# Altium PCB hexbot_运动传感器.PcbDoc
Units mil, origin at the board's own origin, x right, y up, seen from the top; angles counter-clockwise.
Board outline 3150.15 x 2730 mil, 2 copper layers (Top Layer, Bottom Layer); 25 components, 14 nets, 94 pads, 5 vias.
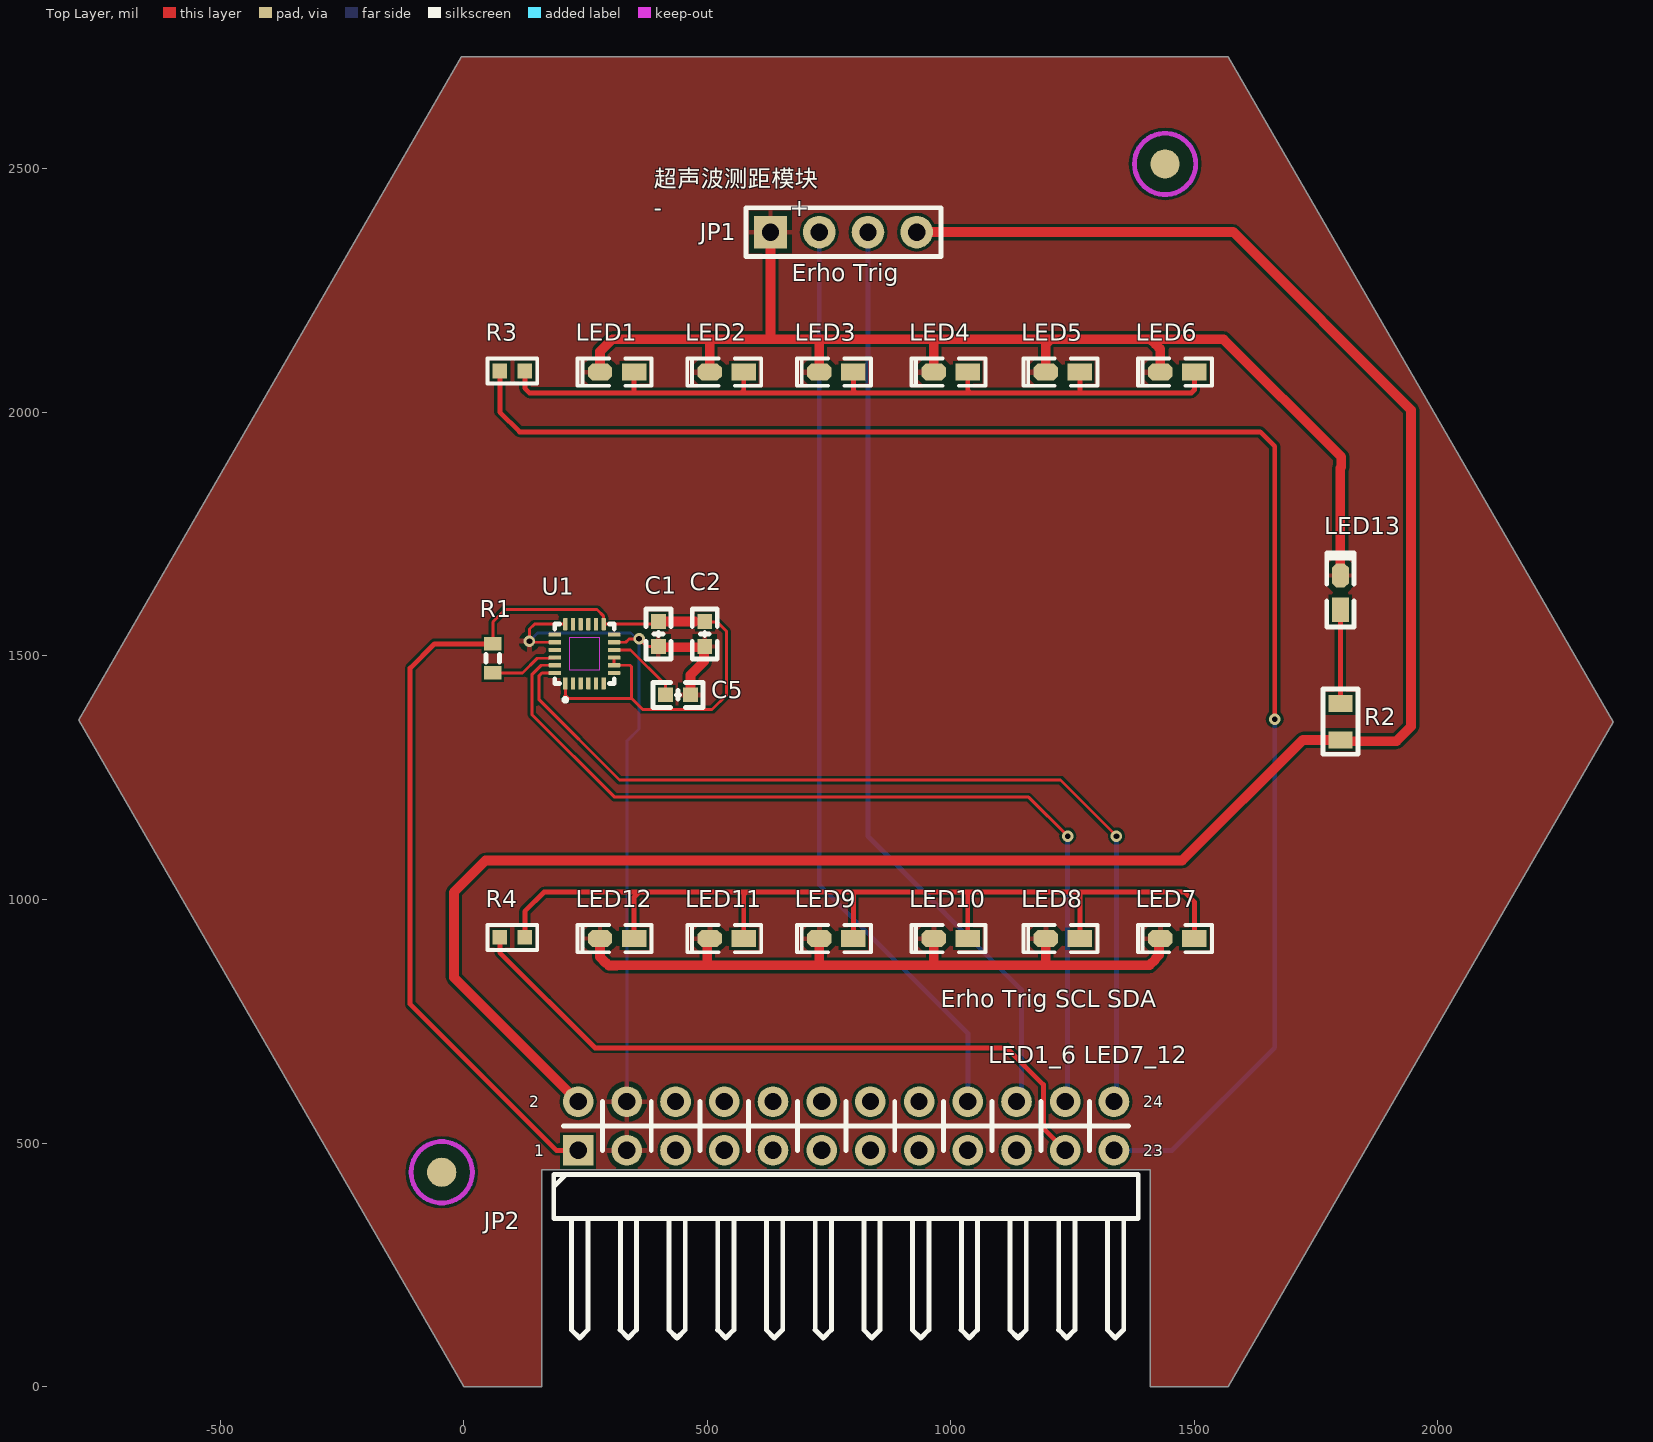
[diagram p0: Top Layer view]
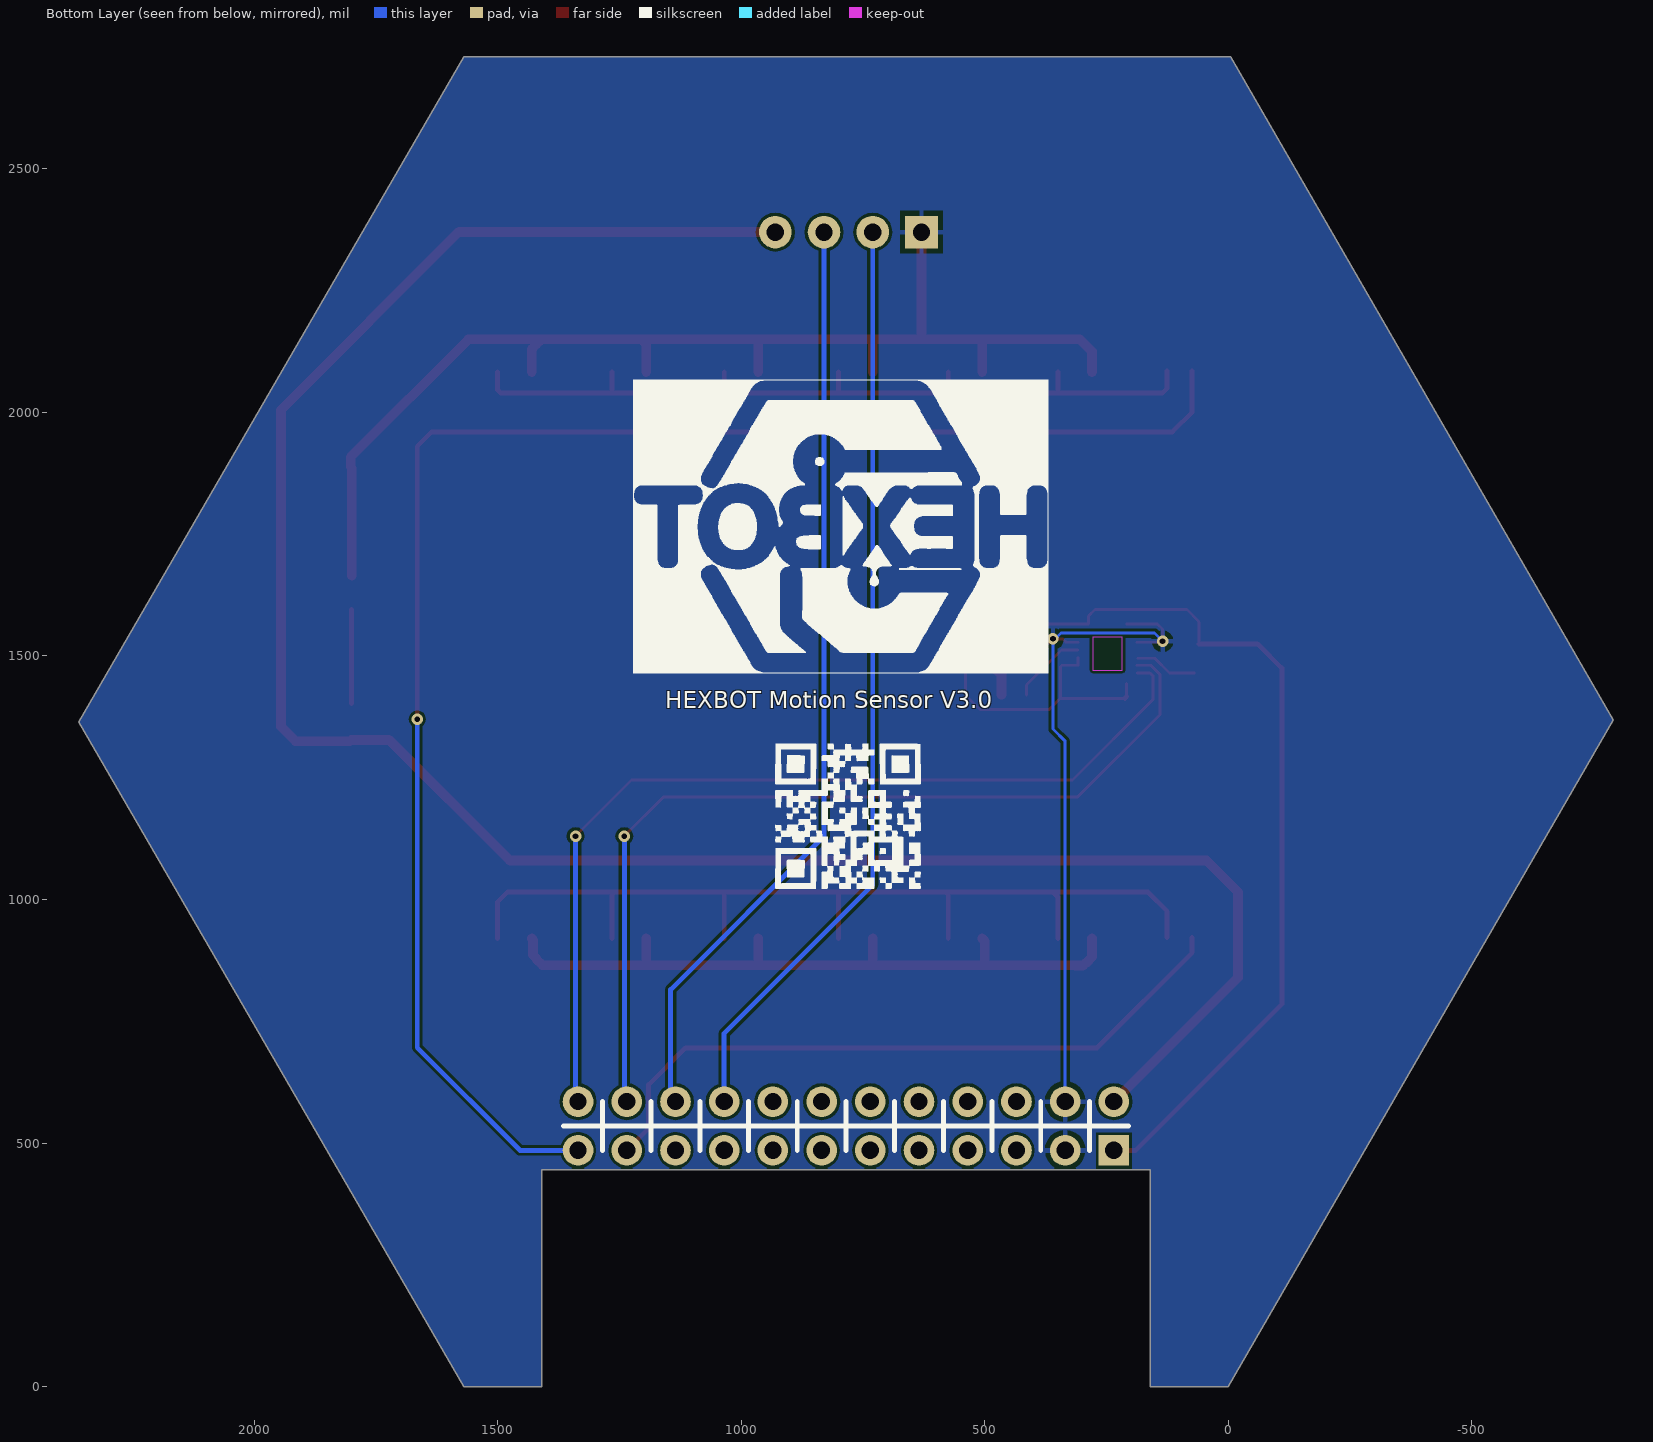
[diagram p1: Bottom Layer view, seen from below]

## Layer stack, top to bottom
Top Solder: solder mask 0.4, Solder Resist, Dk 3.5
Top Layer: signal copper 1.4
Dielectric 1: dielectric 12.6, FR-4, Dk 4.8
Bottom Layer: signal copper 1.4
Bottom Solder: solder mask 0.4, Solder Resist, Dk 3.5

## Board outline
0,0 -790.15,1368.69 -4.71,2730 1570,2730 2360,1364.61 1570,0 1410,0 1410,444.64 160,444.64 160,0

## Design rules (kind name [scope] priority, off if disabled: settings)
Clearance [All] p1: gap=6 ignorepadtopadclearanceinfootprint=FALSE
PolygonConnect [All] p1: connectstyle=Relief reliefconductorwidth=10 reliefentries=4 polygonreliefangle="90 Angle" airgapwidth=10
RoutingVias [All] p1: holewidth=23.62 width=43.31 viastyle="Through Hole" minholewidth=23.62 minwidth=43.31 maxholewidth=28 maxwidth=50
SolderMaskExpansion [All] p1: expansion=4 istentingtop=FALSE
Width [All] p1: maxlimit=20 minlimit=5 preferedwidth=6
30 further rules are at their usual default settings.

## Classes and differential pairs
component class hexbot_运动传感器: C1 C2 C5 JP1 JP2 LED1 LED2 LED3 LED4 LED5 LED6 LED7 LED8 LED9 LED10 LED11 LED12 LED13 R1 R2 R3 R4 U1

## Components (designator, comment, footprint, x,y, rotation, side; value= is the part's Value field where it differs from the comment)
C1 "0.1uF" "C 0603_L" 400,1545 r90 top
C2 "10nF" "C 0603_L" 495,1545 r90 top
C5 "0.1uF" "C 0603_L" 440,1420 r180 top
JP1 "HDR-1X4" HDR2.54-LI-4P 780,2370 r0 top
JP2 "Header 2X11" HDR2.54-WI-2x12P 785,535 r0 top
LED1 "红色" "LED 0603R" 315,2082.85 r180 top
LED2 "红色" "LED 0603R" 540,2082.85 r180 top
LED3 "红色" "LED 0603R" 765,2082.85 r180 top
LED4 "红色" "LED 0603R" 1000,2082.85 r180 top
LED5 "红色" "LED 0603R" 1230,2082.85 r180 top
LED6 "红色" "LED 0603R" 1465,2082.85 r180 top
LED7 "红色" "LED 0603R" 1465,920 r180 top
LED8 "红色" "LED 0603R" 1230,920 r180 top
LED9 "红色" "LED 0603R" 765,920 r180 top
LED10 "红色" "LED 0603R" 1000,920 r180 top
LED11 "红色" "LED 0603R" 540,920 r180 top
LED12 "红色" "LED 0603R" 315,920 r180 top
LED13 "红色" "LED 0603R" 1800,1630 r90 top
mark1 "Mark" Mark 1440,2510 r90 top
mark2 "Mark" Mark -45,440 r90 top
R1 "0R" 0603 60,1495 r270 top
R2 "1K" "R 0805_L" 1800,1365 r270 top
R3 "1K" "R 0603_L" 100,2085 r180 top
R4 "1K" "R 0603_L" 100,922.15 r180 top
U1 "MPU6500" MPU-6050 250,1505 r0 top

## Footprints (in the part's own frame and the unit in brackets; to place one, negate y for a bottom-side part, rotate by r counter-clockwise, add the part's x,y. Pads: shape width x height; smd on the part's side, far side on the other; paste and mask are expansions set on the pad)
0603 [mm]
  rect 0.7x0.9 smd: 1(-0.75,0) 2(0.75,0)
  silkscreen extent -0.2,-0.35 0.2,0.35, body extent -0.83,-0.4 0.77,0.4, height 0.4
"C 0603_L" [mil] "无极性贴片电容                                       淘宝ID:黄晶宝石"
  rect 30x30 smd: 1(-25.59,0) 2(25.59,0)
  silkscreen extent -51,-26 51,26, body extent -31,-16 31,16, height 32
HDR2.54-LI-4P [mm] "排针，4脚"
  rect 1.7x1.7 hole 0.9: 1(-3.81,0)
  round 1.7 hole 0.9: 2(-1.27,0) 3(1.27,0) 4(3.81,0)
  silkscreen extent -5.08,-1.27 5.08,1.27, body extent -5.08,-1.27 5.08,1.27, height 8.5
HDR2.54-WI-2x12P [mm] "双排弯脚排针，12x2脚  淘宝ID:黄晶宝石   店铺网址:https://shop463601444.taobao.com"
  rect 1.6x1.6 hole 0.9: 1(-13.97,-1.27)
  round 1.6 hole 0.9: 2(-13.97,1.27) 3(-11.43,-1.27) 4(-11.43,1.27) 5(-8.89,-1.27) 6(-8.89,1.27) 7(-6.35,-1.27) 8(-6.35,1.27) 9(-3.81,-1.27) 10(-3.81,1.27) 11(-1.27,-1.27) 12(-1.27,1.27) 13(1.27,-1.27) 14(1.27,1.27) 15(3.81,-1.27) 16(3.81,1.27) 17(6.35,-1.27) 18(6.35,1.27) 19(8.89,-1.27) 20(8.89,1.27) 21(11.43,-1.27) 22(11.43,1.27) 23(13.97,-1.27) 24(13.97,1.27)
  silkscreen extent -15.24,-11.06 15.24,1.27, body extent -15.24,-11.23 15.24,1.62, height 5.1
"LED 0603R" [mil] "红色0603LED                                           淘宝ID:黄晶宝石"
  rect 50x35 smd: 1(-35,0.26)
  oct 50x35 smd: 2(35,0.26)
  silkscreen extent -71,-28 81,28, body extent -31,-16 31,16, height 18
Mark [mil]
  round 60 smd mask+39.37: mark(0,0)
  Top Layer keep-out circle w10: c0,0 r62.99
MPU-6050 [mm]
  rrect25% 0.22x0.64 smd: 1(-1.049,-1.561) 2(-0.649,-1.561) 3(-0.249,-1.561) 4(0.151,-1.561) 5(0.551,-1.561) 6(0.951,-1.561) 13(0.951,1.529) 14(0.551,1.529) 15(0.151,1.529) 16(-0.249,1.529) 17(-0.649,1.529) 18(-1.049,1.529)
  rrect25% 0.64x0.22 smd: 7(1.496,-1.016) 8(1.496,-0.616) 9(1.496,-0.216) 10(1.496,0.184) 11(1.496,0.584) 12(1.496,0.984) 19(-1.594,0.984) 20(-1.594,0.584) 21(-1.594,0.184) 22(-1.594,-0.216) 23(-1.594,-0.616) 24(-1.594,-1.016)
  Keep-Out Layer region: 0.721,0.834 0.721,-0.866 -0.819,-0.866 -0.819,0.834
  Keep-Out Layer region: 0.721,0.834 0.721,-0.866 -0.819,-0.866 -0.819,0.834
  silkscreen extent -1.6,-2.52 1.5,1.53
"R 0603_L" [mil] "1/10W贴片电阻                 淘宝ID:黄晶宝石"
  rect 30x30 smd: 1(-25.59,0) 2(25.59,0)
  silkscreen extent -51,-26 51,26, body extent -31,-16 32,16, height 16
"R 0805_L" [mil] "1/8W贴片电阻"
  rect 35x50 smd: 1(-37.4,0) 2(37.4,0)
  silkscreen extent -67,-36 67,36, body extent -39,-25 39,25, height 20

## Part data
C1 C2 C5: library part C, "贴片电容", BOM名称=无极性贴片电容, 唯一出售店铺网址=https://shop463601444.taobao.com, 淘宝ID="封装库来自淘宝 ID：黄晶宝石", 联系售后，技术支持=https://shop463601444.taobao.com
JP1: library part "Header 4", "4P接插件", BOM名称=4P接插件, 学习资源=https://shop463601444.taobao.com, 版权归属="封装库来自淘宝 ID：黄晶宝石"
JP2: library part "Header 12X2", "12*2P接插件", BOM名称=12*2P接插件, 学习资源=https://shop463601444.taobao.com, 版权归属="封装库来自淘宝卖家 ID：黄晶宝石"
LED1 LED2 LED3 LED4 LED5 LED6 LED7 LED8 LED9 LED10 LED11 LED12 LED13: library part LED-SMD, "贴片LED", BOM名称=贴片LED, 学习资源=https://shop463601444.taobao.com, 版权归属="封装库来自淘宝 ID：黄晶宝石"
R1: library part RES2
R2 R3 R4: library part R, "贴片电阻", BOM名称=贴片电阻, 封装库来自淘宝卖家 ID：黄晶宝石=其他店铺购入均为盗版，不享受售后技术支持服务，请立即申请退款, 版权归属="来自淘宝 ID：黄晶宝石", 联系售后=https://shop463601444.taobao.com
U1: library part MPU-9250, "Accelerometer, Gyroscope, Magnetometer, 9 Axis Sensor IÂ²C, SPI Output", Package="TFQFN-24 TDK InvenSense", Availability=Unavailable, MF="TDK InvenSense", MP=MPU-9250, Price=None, SnapEDA_Link=https://www.snapeda.com/parts/MPU-9250/TDK%20InvenSense/view-part/4652549/?ref=snap

## Via types
v1: diameter 23.62, hole 11.81, Top Layer to Bottom Layer, tented both sides, 5 vias

## Nets (pads, with @x,y where several pads share a name; then routed paths per layer and width w, separated by ;. In a path a pad name is that pad's centre, name@x,y a point inside that pad or via, vN(x,y) a via of type N, cw(c..) or ccw(c..) an arc to the next point about the centre after c; other vN are vias at no path point)
3V3: C1.2 C2.2 JP2.1 R1.1 U1.1 U1.8 U1.9 U1.13 | length 2543.8
  Top Layer w6: R1.1 60,1570 85,1595 273.74,1595 287.44,1581.3 U1.13 384.61,1565.2 ; 208.7,1416.3 U1.1 ; 212.5,1412.5 342.5,1412.5 ; U1.9 U1.8 341.49,1480.75 345,1477.23 345,1415 342.5,1412.5 ; 470,1570 520,1570 540,1550 540,1420 510,1390 367.5,1390 345,1412.5 342.5,1412.5
  Top Layer w10: R1.1 -60.47,1524.53 -110,1475 -110,785 190,485 JP2.1 ; 208.7,1416.3 212.5,1412.5 ; C1.2@394.61,1565.2 C1.2
  Top Layer w20: C1.2 475,1570.59
5V: JP1.4 JP2.2 R2.2 | length 4459.8
  Top Layer w20: JP2.2 -20,840 -20,1015 45,1080 1475,1080 1722.6,1327.6 R2.2 1802.6,1325 1915,1325 1945,1355 1945,2005 1580,2370 JP1.4
Erho: JP1.2 JP2.18 | length 1911.3
  Bottom Layer w10: JP1.2 730,1030 1035,725 JP2.18
GND: C1.1 C2.1 C5.1 JP1.1 JP2.3 JP2.4 LED1.2 LED2.2 LED3.2 LED4.2 LED5.2 LED6.2 LED7.2 LED8.2 LED9.2 LED10.2 LED11.2 LED12.2 LED13.2 U1.11 U1.18 U1.20 | length 5615.4
  Top Layer w6: U1.20 135,1527.99 v1(135,1530) 135,1555 145.2,1565.2 U1.18 ; U1.11 332.67,1527.99 339.68,1535 v1(360,1535) 375.59,1519.41 C1.1
  Top Layer w20: LED12.2 280,881.72 291.71,870 292.53,870 297.98,864.55 314.55,864.55 315,865 500,865 ; LED1.2 280,2125 305,2150 510,2150 ; C1.1 401.52,1517.89 493.49,1517.89 493.49,1488.49 465.59,1460.59 C5.1 ; LED11.2 500,914.75 500,865 ; LED2.2 505,2145 510,2150 ; JP1.1 630,2150 ; LED9.2 730,870 725,865 ; LED3.2 730,2150 ; LED10.2 965,870 960,865 ; LED4.2 965,2145 970,2150 ; LED8.2 1195,870 1190,865 ; LED5.2 1195,2140 1205,2150 ; LED7.2 1427.6,917.35 1427.6,885.96 1420,878.36 1420,876.72 1408.28,865 1190,865 ; LED6.2 1430,2130 1419.97,2140.03 1410,2150 ; LED13.2 1799.74,1885.66 1801.72,1887.63 1801.72,1908.28 1560,2150 1410,2150 ; 500,865 725,865 ; 510,2150 630,2150 ; 630,2150 730,2150 ; 725,865 960,865 ; 730,2150 970,2150 ; 960,865 1190,865 ; 970,2150 1205,2150 ; 1205,2150 1410,2150
  Bottom Layer w6: v1(135,1530) 151.83,1546.83 343.4,1546.83 355.23,1535 v1(360,1535) 360,1350 335,1325 JP2.4
LED1_6: JP2.23 R3.2 | length 3369.9
  Top Layer w10: R3.2 74.41,2000.59 115,1960 1635,1960 1665,1930 v1(1665,1370) ; JP2.23 JP2.23@1345,495
  Bottom Layer w10: JP2.23 1454.14,485 1665,695.86 v1(1665,1370)
LED7_12: JP2.21 R4.2 | length 1412.9
  Top Layer w10: R4.2 74.41,890.59 270,695 1115,695 1190,620 1190,530 JP2.21
NetC5_2: C5.2 U1.10 | length 155.8
  Top Layer w6: U1.10 342.76,1512.24 414.41,1440.59 C5.2
NetLED1_1: LED1.1 LED2.1 LED3.1 LED4.1 LED5.1 LED6.1 R3.1 | length 1672.2
  Top Layer w10: R3.1 125.59,2049.41 135,2040 350,2040 ; LED1.1 350,2040 ; LED2.1 575,2045 570,2040 ; LED3.1 800,2045 805,2040 ; LED4.1 1035,2045 1040,2040 ; LED5.1 1265,2040 ; LED6.1 1500,2045.86 1494.14,2040 1265,2040 ; 350,2040 570,2040 ; 570,2040 805,2040 ; 805,2040 1040,2040 ; 1040,2040 1265,2040
NetLED7_1: LED7.1 LED8.1 LED9.1 LED10.1 LED11.1 LED12.1 R4.1 | length 2012.3
  Top Layer w10: R4.1 125.59,975.59 165,1015 360,1015 ; LED12.1 350,1005 360,1015 ; LED11.1 575,1010 580,1015 ; LED9.1 800,1015 ; LED10.1 1035,1015 ; LED8.1 1265,1010 1260,1015 ; LED7.1 1500,995 1480,1015 1265,1015 1260,1015 ; 360,1015 580,1015 ; 580,1015 800,1015 ; 800,1015 1035,1015 ; 1035,1015 1260,1015
NetLED13_1: LED13.1 R2.1 | length 192.7
  Top Layer w10: LED13.1 1800,1594.75 R2.1
NetR1_2: R1.2 U1.22 | length 128.4
  Top Layer w6: R1.2@70,1465 121.06,1465 151.22,1495.17 U1.22@185.92,1495.17
SCL: JP2.22 U1.23 | length 1895.6
  Top Layer w6: U1.23 159.32,1480.75 140,1461.43 140,1380 310,1210 1160,1210 v1(1240,1130)
  Bottom Layer w10: JP2.22 1225,595 1240,610 v1(1240,1130)
SDA: JP2.24 U1.24 | length 1932.1
  Top Layer w6: U1.24 160.54,1465 155,1459.46 155,1410 320,1245 1225,1245 v1(1340,1130)
  Bottom Layer w10: JP2.24 1340,590 v1(1340,1130)
Trig: JP1.3 JP2.20 | length 1919.6
  Bottom Layer w10: JP1.3 830,1130 1145,815 1145,595 JP2.20
pads on no net: JP2.5 JP2.6 JP2.7 JP2.8 JP2.9 JP2.10 JP2.11 JP2.12 JP2.13 JP2.14 JP2.15 JP2.16 JP2.17 JP2.19 mark1.mark mark2.mark U1.2 U1.3 U1.4 U1.5 U1.6 U1.7 U1.12 U1.14 U1.15 U1.16 U1.17 U1.19 U1.21

## Polygon pours and split planes (outlines as drawn)
GND on Top Layer "Top Layer-No Net" (solid, remove dead copper, pour order 4): 0,0 -790.15,1368.69 -4.71,2730 1570,2730 2360,1364.61 1570,0 1410,0 1410,444.64 160,444.64 160,0
GND on Bottom Layer "Top Layer-No Net1" (solid, remove dead copper, pour order 5): 0,0 -790.15,1368.69 -4.71,2730 1570,2730 2360,1364.61 1570,0 1410,0 1410,444.64 160,444.64 160,0

## Silkscreen, mask and mechanical layers (free items; w line width, h text height)
Top Overlay:
  text "超声波测距模块 / -                 +" at 390.12,2390.53 h60
  text "Erho Trig" at 673.69,2256.44 h60
  text "Erho Trig SCL SDA" at 979.64,766.11 h60
  text "LED1_6 LED7_12" at 1077.2,651.06 h60
Bottom Overlay:
  drawing of 3021 lines, arcs and shapes, not listed
  text "HEXBOT Motion Sensor V3.0" at 1155.65,1381.04 h59.06
Mechanical 1:
  the board outline again, w10

## Text inside footprints (layer, text, board x,y; h text height)
JP2: Top Overlay "1" at 145,465 h40; Top Overlay "2" at 135,565 h40; Top Overlay "23" at 1395,465 h40; Top Overlay "24" at 1395,565 h40